# EAGLE board MODIF_PT_ELECROW_VNT (EAGLE 6.5.0)
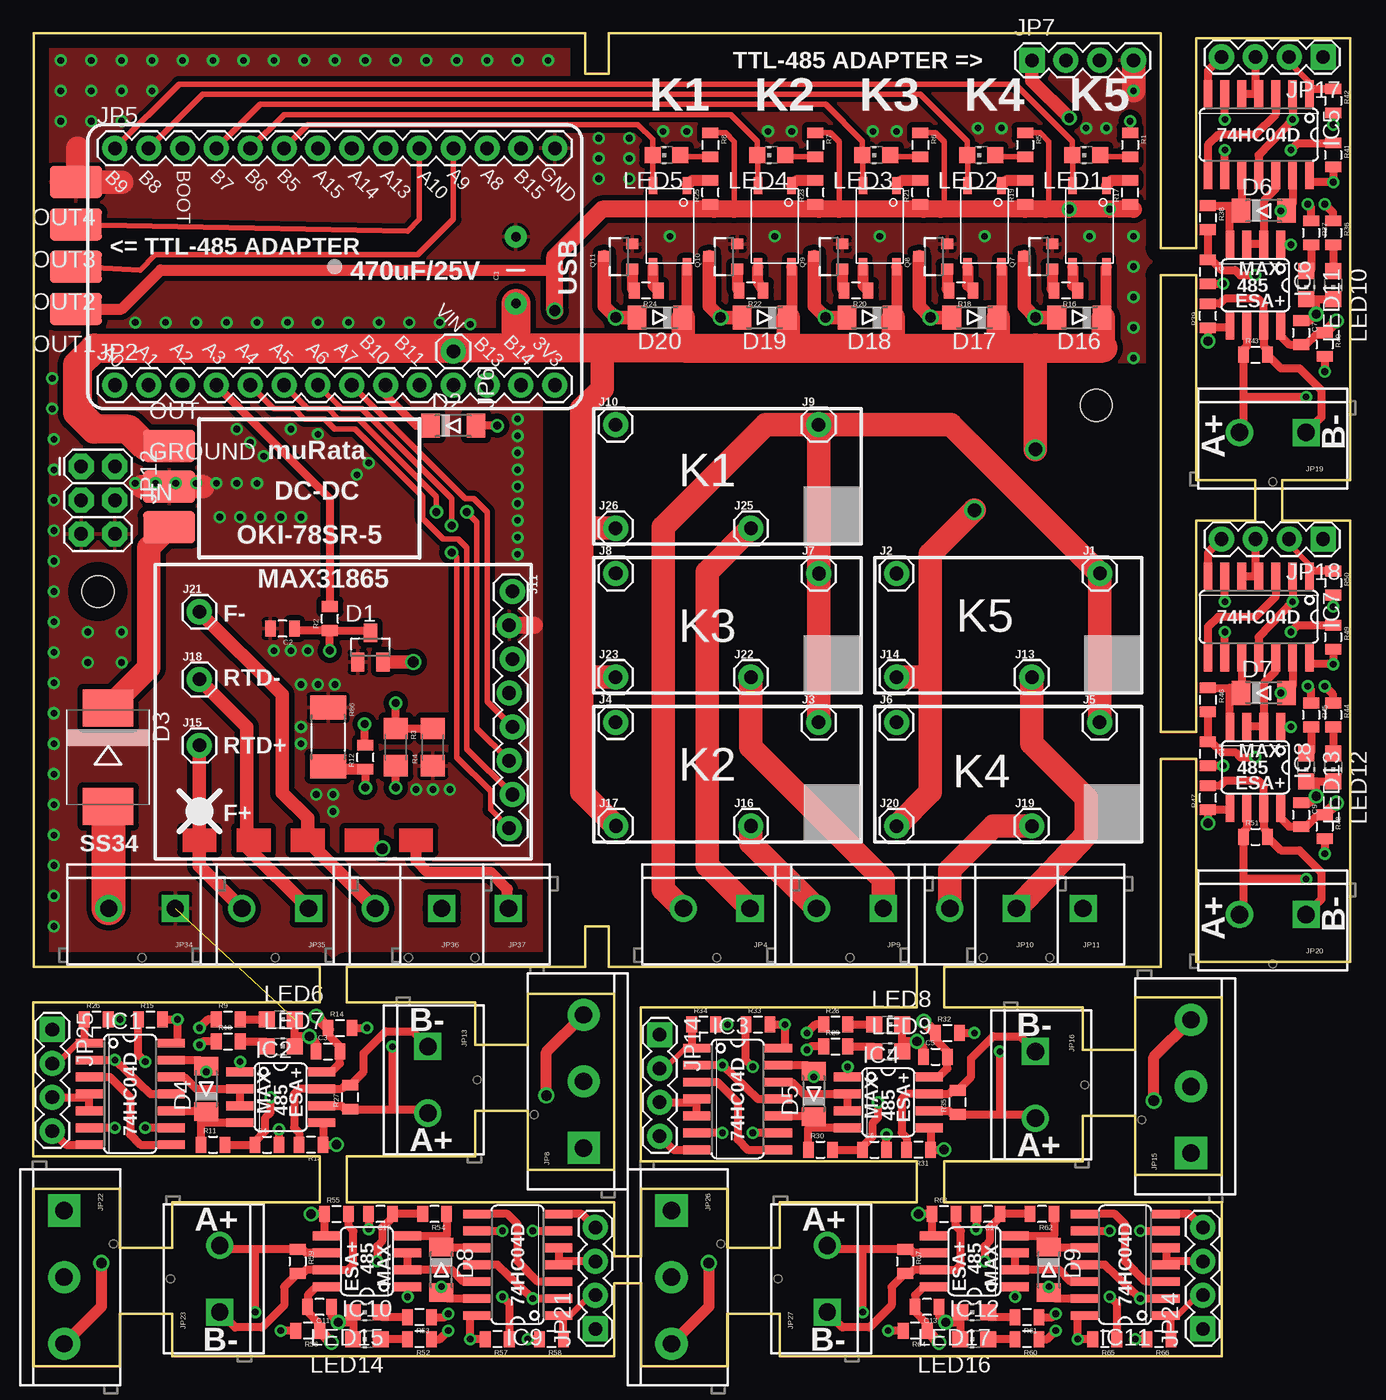
[diagram p0: board, top side]
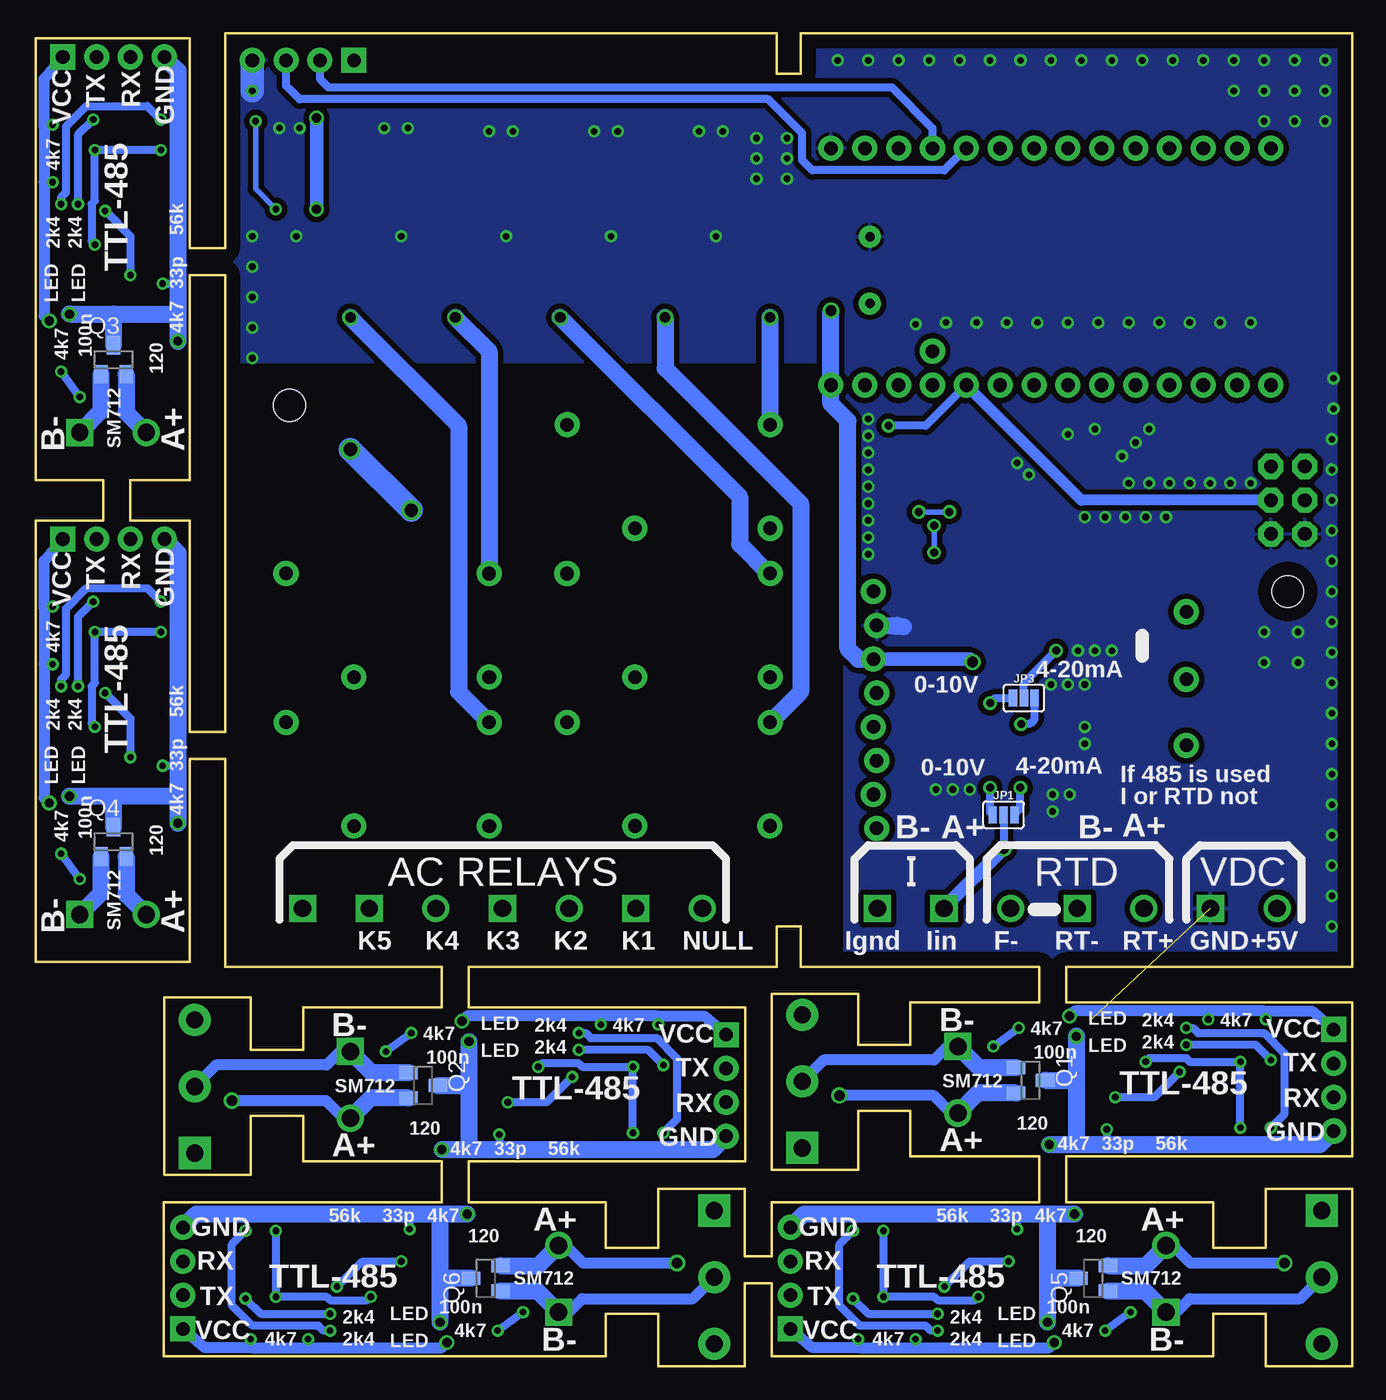
[diagram p1: board, bottom side, seen from below]

Size 98.83 x 100.08 mm. Coordinates in mm from the lower left corner, seen from the top.
Outline: 0.03,100.08 0.03,29.97 21.49,29.97 21.49,27.3 0,27.3 0,15.75 21.49,15.75 21.49,12.32 10.44,12.32 10.44,8.89 6.5,8.89 6.5,13.34 0.03,13.34 0.03,0 6.5,0 6.5,3.94 10.44,3.94 10.44,0.76 43.59,0.76 43.59,6.22 45.62,6.22 45.62,0 52.1,0 52.1,3.94 56.03,3.94 56.03,0.76 89.2,0.76 89.2,12.32 68.35,12.32 68.35,15.37 78.77,15.37 78.77,18.8 82.7,18.8 82.7,14.35 89.18,14.35 89.18,27.69 82.7,27.69 82.7,23.75 78.77,23.75 78.77,26.92 68.35,26.92 68.35,29.97 84.61,29.97 84.61,45.59 87.27,45.59 87.27,30.35 98.83,30.35 98.83,63.5 93.75,63.5 93.75,66.55 98.83,66.55 98.83,99.72 87.27,99.72 87.27,83.95 84.61,83.95 84.61,100.08 43.21,100.08 43.21,97.03 41.43,97.03 41.43,100.08 0.03,100.08
Outline: 43.21,29.97 43.21,33.02 41.43,33.02 41.43,29.97 23.52,29.97 23.52,27.3 33.17,27.3 33.17,24.13 37.11,24.13 37.11,27.94 43.59,27.94 43.59,14.73 37.11,14.73 37.11,19.18 33.17,19.18 33.17,15.75 23.52,15.75 23.52,12.32 43.59,12.32 43.59,8.26 45.62,8.26 45.62,13.34 52.1,13.34 52.1,8.89 56.03,8.89 56.03,12.32 66.32,12.32 66.32,15.37 45.59,15.37 45.59,26.92 66.32,26.92 66.32,29.97 43.21,29.97
Outline: 87.27,81.92 87.27,66.55 91.72,66.55 91.72,63.5 87.27,63.5 87.27,47.62 84.61,47.62 84.61,81.92 87.27,81.92
Copper layers (1*16): Top 0.035mm / dielectric 1.5mm / Bottom 0.035mm
Design rules "default *": minimum track width 10mil, minimum drill 24mil, track to track 8mil, track to pad 8mil, pad to pad 8mil, via to via 8mil, smd to smd 8mil, copper to edge 40mil, drill to drill 8mil, minimum pad ring 10mil, minimum via ring 8mil, stop-mask expansion 4mil, vias tented up to drill 24mil, thermal gap 10mil
Holes 2.4 mm at 4.85,58.17 79.78,72.14

## Footprints (pad centres in the part's own frame; a part is rotated, then mirrored left to right if it is on the bottom)
CAP-PTH-5MM = drill 0.7 pad 1.651: 1 -2.5,0; 2 2.5,0
0805 = smd 0.8 x 1.2: 1 -0.9,0; 2 0.9,0
SOT23 = smd 1 x 1.4: 1 -0.95,-1.1; 2 0.95,-1.1; 3 0,1.1
MINIMELF = smd 1.4 x 1.8: A 1.7,0; C -1.7,0
SMC = smd 2.8 x 3.8: A 3.7,0; C -3.7,0
LUXEON-PAD = smd 3.9 x 2.4: P$1 0,0
SO14 = smd 0.66 x 2.032: 1 -3.81,-3.073; 2 -2.54,-3.073; 3 -1.27,-3.073; 4 0,-3.073; 5 1.27,-3.073; 6 2.54,-3.073; 7 3.81,-3.073; 8 3.81,3.073; 9 2.54,3.073; 10 1.27,3.073; 11 0,3.073; 12 -1.27,3.073; 13 -2.54,3.073; 14 -3.81,3.073
SO08 = smd 0.66 x 2.032: 1 -1.905,-3.073; 2 -0.635,-3.073; 3 0.635,-3.073; 4 1.905,-3.073; 5 1.905,3.073; 6 0.635,3.073; 7 -0.635,3.073; 8 -1.905,3.073
1X01@2 = drill 1.016 pad 1.88: 1 0,0
1X08_LOCK = drill 1.016 pad 1.88: 1 0,0.127; 2 2.54,-0.127; 3 5.08,0.127; 4 7.62,-0.127; 5 10.16,0.127; 6 12.7,-0.127; 7 15.24,0.127; 8 17.78,-0.127
SMT-JUMPER_3_1-NC_PASTE_SILK = smd 0.635 x 1.27: 1 -0.813,0; 2 0,0; 3 0.813,0
1X14 = drill 1.016 pad 1.88: 1 0,0; 2 2.54,0; 3 5.08,0; 4 7.62,0; 5 10.16,0; 6 12.7,0; 7 15.24,0; 8 17.78,0; 9 20.32,0; 10 22.86,0; 11 25.4,0; 12 27.94,0; 13 30.48,0; 14 33.02,0
SCREWTERMINAL-5MM-2 = drill 1.3 pad 2.032 square: 1 0,0 | drill 1.3 pad 2.032: 2 5,0
1X01 = drill 1.016 pad 1.88: 1 0,0
1X04 = drill 1.016 pad 1.88 square: 1 0,0 | drill 1.016 pad 1.88: 2 2.54,0; 3 5.08,0; 4 7.62,0
SCREWTERMINAL-5MM-3 = drill 1.3 pad 2.413 square: 1 0,0 | drill 1.3 pad 2.413: 2 5,0; 3 10,0
2X3 = drill 1.016 pad 1.88 octagon: 1 0,0; 2 0,2.54; 3 2.54,0; 4 2.54,2.54; 5 5.08,0; 6 5.08,2.54
CHIP-LED0805 = smd 1.2 x 1.2: A 0,-1.05; C 0,1.05
SOT23-3 = smd 0.8 x 0.9: 1 -0.95,-1; 2 0.95,-1; 3 0,1.1
1206 = smd 1.6 x 1.8: 1 -1.4,0; 2 1.4,0
R2010 = smd 1.8 x 2.7: 1 -2.2,0; 2 2.2,0
TLP181-I = smd 1.27 x 0.635: P$1 -3.048,1.27; P$2 -3.048,-1.27; P$3 3.048,-1.27; P$4 3.048,1.27

## Placement (x,y rotation side)
C1  [CAP-PTH-5MM]  36.22,82.3 90 top
C2  100n  [0805]  18.69,55.37 180 top
C3  100n  [0805]  22.12,23.62 0 top
C4  33pF  [0805]  17.55,16.64 0 top
C5  100n  [0805]  67.72,23.24 0 top
C6  33pF  [0805]  63.14,16.26 0 top
C7  100n  [0805]  95.15,77.6 270 top
C8  33pF  [0805]  88.16,82.17 270 top
C9  100n  [0805]  95.15,41.4 270 top
C10  33pF  [0805]  88.16,45.97 270 top
C11  100n  [0805]  21.49,4.45 180 top
C12  33pF  [0805]  26.06,11.43 180 top
C13  100n  [0805]  67.08,4.45 180 top
C14  33pF  [0805]  71.65,11.43 180 top
D1  BAT54S  [SOT23]  25.3,53.98 0 top
D2  1N4148  [MINIMELF]  31.52,70.61 0 top
D3  SS34  [SMC]  5.61,45.72 270 top
D4  1N4148  [MINIMELF]  12.98,20.83 90 top
D5  1N4148  [MINIMELF]  58.57,20.45 90 top
D6  1N4148  [MINIMELF]  92.35,86.74 0 top
D7  1N4148  [MINIMELF]  92.35,50.55 0 top
D8  1N4148  [MINIMELF]  30.63,7.24 270 top
D9  1N4148  [MINIMELF]  76.23,7.24 270 top
D16  [MINIMELF]  78.51,78.74 180 top
D17  [MINIMELF]  70.64,78.74 180 top
D18  [MINIMELF]  62.76,78.74 180 top
D19  [MINIMELF]  54.89,78.74 180 top
D20  [MINIMELF]  47.02,78.74 180 top
GROUND  M01SMD  [LUXEON-PAD]  10.19,66.04 0 top
IC1  74HC04D  [SO14]  7.26,20.45 270 top
IC2  MAX3468CSA  [SO08]  18.57,20.19 270 top
IC3  74HC04D  [SO14]  52.86,20.07 270 top
IC4  MAX3468CSA  [SO08]  64.16,19.81 270 top
IC5  74HC04D  [SO14]  91.97,92.46 180 top
IC6  MAX3468CSA  [SO08]  91.72,81.15 180 top
IC7  74HC04D  [SO14]  91.97,56.26 180 top
IC8  MAX3468CSA  [SO08]  91.72,44.96 180 top
IC9  74HC04D  [SO14]  36.35,7.62 90 top
IC10  MAX3468CSA  [SO08]  25.04,7.87 90 top
IC11  74HC04D  [SO14]  81.94,7.62 90 top
IC12  MAX3468CSA  [SO08]  70.64,7.87 90 top
IN  M01SMD  [LUXEON-PAD]  10.19,62.99 0 top
J1  [1X01@2]  80.04,59.52 0 top
J2  [1X01@2]  64.79,59.51 0 top
J3  [1X01@2]  58.95,48.34 0 top
J4  [1X01@2]  43.71,48.35 0 top
J5  [1X01@2]  80.04,48.34 0 top
J6  [1X01@2]  64.79,48.34 0 top
J7  [1X01@2]  58.95,59.51 0 top
J8  [1X01@2]  43.71,59.52 0 top
J9  [1X01@2]  58.95,70.69 0 top
J10  [1X01@2]  43.7,70.69 0 top
J11  [1X08_LOCK]  35.84,58.17 270 top
J13  [1X01@2]  74.95,51.74 0 top
J14  [1X01@2]  64.79,51.74 0 top
J15  [1X01@2]  12.47,46.61 0 top
J16  [1X01@2]  53.86,40.56 0 top
J17  [1X01@2]  43.72,40.56 0 top
J18  [1X01@2]  12.47,51.56 0 top
J19  [1X01@2]  74.95,40.56 0 top
J20  [1X01@2]  64.79,40.56 0 top
J21  [1X01@2]  12.47,56.64 0 top
J22  [1X01@2]  53.86,51.74 0 top
J23  [1X01@2]  43.71,51.74 0 top
J25  [1X01@2]  53.86,62.91 0 top
J26  [1X01@2]  43.71,62.91 0 top
JP1  JUMPER-SMT_3_1-NC_PASTE_SILK  [SMT-JUMPER_3_1-NC_PASTE_SILK]  26.19,41.4 0 bottom
JP2  M14  [1X14]  6.12,73.66 0 top
JP3  JUMPER-SMT_3_1-NC_PASTE_SILK  [SMT-JUMPER_3_1-NC_PASTE_SILK]  24.66,50.16 0 bottom
JP4  [SCREWTERMINAL-5MM-2]  53.79,34.37 180 top
JP5  M14  [1X14]  6.12,91.44 0 top
JP6  M01PTH  [1X01]  31.52,76.2 270 top
JP7  [1X04]  74.96,98.04 0 top
JP8  [SCREWTERMINAL-5MM-3]  41.3,16.38 90 top
JP9  [SCREWTERMINAL-5MM-2]  63.79,34.37 180 top
JP10  [SCREWTERMINAL-5MM-2]  73.79,34.37 180 top
JP11  [SCREWTERMINAL-5MM-2]  78.79,34.37 180 top
JP12  [2X3]  3.58,67.56 270 top
JP13  [SCREWTERMINAL-5MM-2]  29.62,24 270 top
JP14  [1X04]  47.02,24.89 270 top
JP15  [SCREWTERMINAL-5MM-3]  86.89,16 90 top
JP16  [SCREWTERMINAL-5MM-2]  75.21,23.62 270 top
JP17  [1X04]  96.8,98.3 180 top
JP18  [1X04]  96.8,62.1 180 top
JP19  [SCREWTERMINAL-5MM-2]  95.53,70.1 180 top
JP20  [SCREWTERMINAL-5MM-2]  95.53,33.91 180 top
JP21  [1X04]  42.19,2.79 90 top
JP22  [SCREWTERMINAL-5MM-3]  2.31,11.68 270 top
JP23  [SCREWTERMINAL-5MM-2]  14,4.06 90 top
JP24  [1X04]  87.78,2.79 90 top
JP25  [1X04]  1.42,25.27 270 top
JP26  [SCREWTERMINAL-5MM-3]  47.9,11.68 270 top
JP27  [SCREWTERMINAL-5MM-2]  59.59,4.06 90 top
JP34  [SCREWTERMINAL-5MM-2]  10.66,34.37 180 top
JP35  [SCREWTERMINAL-5MM-2]  20.66,34.37 180 top
JP36  [SCREWTERMINAL-5MM-2]  30.66,34.37 180 top
JP37  [SCREWTERMINAL-5MM-2]  35.66,34.37 180 top
LED1  [CHIP-LED0805]  79.02,90.93 90 top
LED2  [CHIP-LED0805]  71.15,90.93 90 top
LED3  [CHIP-LED0805]  63.27,90.93 90 top
LED4  [CHIP-LED0805]  55.4,90.93 90 top
LED5  [CHIP-LED0805]  47.52,90.93 90 top
LED6  [CHIP-LED0805]  18.57,26.04 270 top
LED7  [CHIP-LED0805]  18.57,24 270 top
LED8  [CHIP-LED0805]  64.16,25.65 270 top
LED9  [CHIP-LED0805]  64.16,23.62 270 top
LED10  [CHIP-LED0805]  97.56,81.15 180 top
LED11  [CHIP-LED0805]  95.53,81.15 180 top
LED12  [CHIP-LED0805]  97.56,44.96 180 top
LED13  [CHIP-LED0805]  95.53,44.96 180 top
LED14  [CHIP-LED0805]  25.04,2.03 90 top
LED15  [CHIP-LED0805]  25.04,4.06 90 top
LED16  [CHIP-LED0805]  70.64,2.03 90 top
LED17  [CHIP-LED0805]  70.64,4.06 90 top
OUT  M01SMD  [LUXEON-PAD]  10.19,69.09 0 top
OUT1  M01SMD  [LUXEON-PAD]  3.2,79.38 180 top
OUT2  M01SMD  [LUXEON-PAD]  3.2,82.55 180 top
OUT3  M01SMD  [LUXEON-PAD]  3.2,85.72 180 top
OUT4  M01SMD  [LUXEON-PAD]  3.2,88.9 180 top
Q1  BCX70SMD  [SOT23]  24.16,21.46 270 bottom
Q2  BCX70SMD  [SOT23]  69.75,21.08 270 bottom
Q3  BCX70SMD  [SOT23]  92.99,75.56 0 bottom
Q4  BCX70SMD  [SOT23]  92.99,39.37 0 bottom
Q5  BCX70SMD  [SOT23]  19.46,6.6 90 bottom
Q6  BCX70SMD  [SOT23]  65.05,6.6 90 bottom
Q7  MPSA42  [SOT23-3]  75.46,83.31 90 top
Q8  MPSA42  [SOT23-3]  67.59,83.31 90 top
Q9  MPSA42  [SOT23-3]  59.72,83.31 90 top
Q10  MPSA42  [SOT23-3]  51.84,83.31 90 top
Q11  MPSA42  [SOT23-3]  43.97,83.31 90 top
R1  1K  [0805]  82.32,91.69 270 top
R2  100  [0805]  22.25,56.13 90 top
R3  20K  [1206]  27.2,46.48 270 top
R4  10K  [1206]  30,46.48 90 top
R5  1K  [0805]  74.45,91.69 270 top
R6  1K  [0805]  66.57,91.69 270 top
R7  1K  [0805]  58.7,91.69 270 top
R8  1K  [0805]  50.83,91.69 270 top
R9  2K4  [0805]  14.63,26.04 0 top
R10  2K4  [0805]  14.63,24.38 0 top
R11  56K  [0805]  13.49,16.64 0 top
R12  1k  [0805]  24.92,45.72 90 top
R13  4K7  [0805]  20.85,16.64 180 top
R14  4K7  [0805]  23.01,25.4 0 top
R15  4K7  [0805]  8.79,26.04 0 top
R16  510  [0805]  77.5,80.77 180 top
R17  680  [0805]  82.32,88.14 90 top
R18  510  [0805]  69.62,80.77 180 top
R19  680  [0805]  74.45,88.14 90 top
R20  510  [0805]  61.75,80.77 180 top
R21  680  [0805]  66.57,88.14 90 top
R22  510  [0805]  53.87,80.77 180 top
R23  680  [0805]  58.7,88.14 90 top
R24  510  [0805]  46,80.77 180 top
R25  680  [0805]  50.83,88.14 90 top
R26  4K7  [0805]  4.72,26.04 0 top
R27  120  [0805]  23.77,20.19 90 top
R28  2K4  [0805]  60.22,25.65 0 top
R29  2K4  [0805]  60.22,24 0 top
R30  56K  [0805]  59.08,16.26 0 top
R31  4K7  [0805]  66.45,16.26 180 top
R32  4K7  [0805]  68.61,25.02 0 top
R33  4K7  [0805]  54.38,25.65 0 top
R34  4K7  [0805]  50.32,25.65 0 top
R35  120  [0805]  69.37,19.81 90 top
R36  2K4  [0805]  97.56,85.09 270 top
R37  2K4  [0805]  95.91,85.09 270 top
R38  56K  [0805]  88.16,86.23 270 top
R39  4K7  [0805]  88.16,78.87 90 top
R40  4K7  [0805]  96.93,76.71 270 top
R41  4K7  [0805]  97.56,90.93 270 top
R42  4K7  [0805]  97.56,95 270 top
R43  120  [0805]  91.72,75.95 0 top
R44  2K4  [0805]  97.56,48.9 270 top
R45  2K4  [0805]  95.91,48.9 270 top
R46  56K  [0805]  88.16,50.04 270 top
R47  4K7  [0805]  88.16,42.67 90 top
R48  4K7  [0805]  96.93,40.51 270 top
R49  4K7  [0805]  97.56,54.74 270 top
R50  4K7  [0805]  97.56,58.8 270 top
R51  120  [0805]  91.72,39.75 0 top
R52  2K4  [0805]  28.98,2.03 180 top
R53  2K4  [0805]  28.98,3.68 180 top
R54  56K  [0805]  30.12,11.43 180 top
R55  4K7  [0805]  22.76,11.43 0 top
R56  4K7  [0805]  20.6,2.67 180 top
R57  4K7  [0805]  34.82,2.03 180 top
R58  4K7  [0805]  38.89,2.03 180 top
R59  120  [0805]  19.84,7.87 270 top
R60  2K4  [0805]  74.57,2.03 180 top
R61  2K4  [0805]  74.57,3.68 180 top
R62  56K  [0805]  75.72,11.43 180 top
R63  4K7  [0805]  68.35,11.43 0 top
R64  4K7  [0805]  66.19,2.67 180 top
R65  4K7  [0805]  80.42,2.03 180 top
R66  4K7  [0805]  84.48,2.03 180 top
R67  120  [0805]  65.43,7.87 270 top
R86  120ohm  [R2010]  22.12,47.24 270 top
U$13  IS181D-I  [TLP181-I]  71.4,85.6 270 top
U$14  IS181D-I  [TLP181-I]  79.27,85.6 270 top
U$15  IS181D-I  [TLP181-I]  63.53,85.6 270 top
U$16  IS181D-I  [TLP181-I]  55.65,85.6 270 top
U$17  IS181D-I  [TLP181-I]  47.78,85.6 270 top

## Library data of the parts
C1-C14 R1-R67 R86 = SparkFun-Passives
D1-D9 = diode
D16-D20 = diode_NEDELCU
GROUND IN J1-J11 J13-J23 J25 J26 JP2 JP4-JP7 JP9-JP11 JP13 JP14 JP16-JP21 JP23-JP25 JP27 JP34-JP37 OUT OUT1-OUT4 = SparkFun-Connectors
IC1 IC3 IC5 IC7 IC9 IC11 = 74xx-eu
IC2 IC4 IC6 IC8 IC10 IC12 = maxim; MPN: MAX3468CSA+; OC_FARNELL: unknown; OC_NEWARK: 76K6721
JP1 JP3 = SparkFun-Jumpers
JP8 JP15 JP22 JP26 = SparkFun-Connectors; STOREFRONT_ID: PRT-08433
JP12 = SparkFun-Connectors; PROD_ID: CONN-09701
LED1-LED17 = led
Q1-Q6 = transistor-npn
Q7-Q11 = SparkFun-DiscreteSemi; PROD_ID: TRANS-09116
U$13-U$17 = IS181-I

## Nets
3.3V: D1.2 J11.3 JP2.14 JP7.1 OUT1.P$1 R1.1 R5.1 R6.1 R7.1 R8.1 R17.1 R19.1 R21.1 R23.1 R25.1
3.3V1: C5.2 IC3.14 IC4.8 JP14.1 R32.1 R33.2 R34.2
3.3V2: C7.2 IC5.14 IC6.8 JP17.1 R40.1 R41.2 R42.2
3.3V3: C9.2 IC7.14 IC8.8 JP18.1 R48.1 R49.2 R50.2
3.3V4: C11.2 IC9.14 IC10.8 JP21.1 R56.1 R57.2 R58.2
3.3V5: C13.2 IC11.14 IC12.8 JP24.1 R64.1 R65.2 R66.2
5V: C1.1 D16.C D17.C D18.C D19.C D20.C J14.1 J17.1 J20.1 J23.1 J26.1 JP6.1 OUT.P$1 U$13.P$4 U$14.P$4 U$15.P$4 U$16.P$4 U$17.P$4
A0: JP2.1
A1: JP2.2
A2: JP2.3
A3: JP2.4 R2.2
A4: J11.7 JP2.5
A5: J11.6 JP2.6
A6: J11.8 JP2.7
A7: J11.5 JP2.8
A8: JP5.12
A9: JP5.11 JP7.2 OUT2.P$1
A10: JP5.10 JP7.3 OUT3.P$1
A13: JP5.9
A14: JP5.8
A15: JP5.7
A+: IC2.6 JP8.3 JP13.2 Q1.2 R14.2 R27.1
A+1: IC4.6 JP15.3 JP16.2 Q2.2 R32.2 R35.1
A+2: IC6.6 JP19.2 Q3.2 R40.2 R43.1
A+3: IC8.6 JP20.2 Q4.2 R48.2 R51.1
A+4: IC10.6 JP22.3 JP23.2 Q5.2 R56.2 R59.1
A+5: IC12.6 JP26.3 JP27.2 Q6.2 R64.2 R67.1
B5: JP5.6 LED5.C U$17.P$2
B6: JP5.5 LED4.C U$16.P$2
B7: JP5.4 LED3.C U$15.P$2
B8: JP5.2 LED2.C U$13.P$2
B9: JP5.1 LED1.C U$14.P$2
B12(CS): JP2.11
B13(SCK): JP2.12
B14(MISO): JP2.13
B15(MOSI): JP5.13
B-: IC2.7 JP8.2 JP13.1 Q1.1 R13.2 R27.2
B-1: IC4.7 JP15.2 JP16.1 Q2.1 R31.2 R35.2
B-2: IC6.7 JP19.1 Q3.1 R39.2 R43.2
B-3: IC8.7 JP20.1 Q4.1 R47.2 R51.2
B-4: IC10.7 JP22.2 JP23.1 Q5.1 R55.2 R59.2
B-5: IC12.7 JP26.2 JP27.1 Q6.1 R63.2 R67.2
BOOT: JP5.3
F-: J21.1 JP36.2
GND: C1.2 C2.2 C3.1 C4.2 D1.1 GROUND.P$1 IC1.7 IC2.5 J11.2 JP5.14 JP7.4 JP12.5 JP12.6 JP25.4 JP34.1 LED6.C LED7.C OUT4.P$1 Q1.3 Q7.2 Q8.2 Q9.2 Q10.2 Q11.2 R4.1 R13.1 R86.1
GND2: C5.1 C6.2 IC3.7 IC4.5 JP14.4 LED8.C LED9.C Q2.3 R31.1
GND3: C7.1 C8.2 IC5.7 IC6.5 JP17.4 LED10.C LED11.C Q3.3 R39.1
GND4: C9.1 C10.2 IC7.7 IC8.5 JP18.4 LED12.C LED13.C Q4.3 R47.1
GND5: C11.1 C12.2 IC9.7 IC10.5 JP21.4 LED14.C LED15.C Q5.3 R55.1
GND6: C13.1 C14.2 IC11.7 IC12.5 JP24.4 LED16.C LED17.C Q6.3 R63.1
K1: J25.1 JP4.1
K2: J16.1 JP9.2
K3: J22.1 JP9.1
K4: J19.1 JP10.2
K5: J13.1 JP10.1 JP11.2
K6: JP11.1
N$1: LED1.A R1.2
N$2: LED2.A R5.2
N$3: LED3.A R6.2
N$4: D3.A JP34.2
N$5: JP3.3 R12.2
N$6: JP3.1 R3.1 R4.2
N$7: C2.1 D1.3 JP3.2 R2.1
N$8: JP1.1 R3.2
N$9: LED4.A R7.2
N$10: LED5.A R8.2
N$11: D3.C IN.P$1
N$12: JP37.1
N$13: IC3.9 IC4.1 R33.1
N$14: IC3.3 IC3.8
N$15: C6.1 D5.A IC3.13 R30.2
N$16: LED7.A R10.2
N$17: LED6.A R9.2
N$18: IC3.6 R28.1
N$19: IC1.2 IC1.11 R10.1
N$20: D5.C IC3.10 IC4.4 R30.1
N$21: IC1.9 IC2.1 R15.1
N$22: JP1.2 JP36.1 JP37.2
N$23: IC1.3 IC1.8
N$24: C4.1 D4.A IC1.13 R11.2
N$25: IC3.12 IC4.2 IC4.3
N$26: LED9.A R29.2
N$27: IC1.6 R9.1
N$28: LED8.A R28.2
N$29: D4.C IC1.10 IC2.4 R11.1
N$30: IC1.12 IC2.2 IC2.3
N$31: IC3.2 IC3.11 R29.1
N$32: IC5.9 IC6.1 R41.1
N$33: IC5.3 IC5.8
N$34: C8.1 D6.A IC5.13 R38.2
N$35: IC5.6 R36.1
N$36: D6.C IC5.10 IC6.4 R38.1
N$37: IC5.12 IC6.2 IC6.3
N$38: LED11.A R37.2
N$39: LED10.A R36.2
N$40: IC5.2 IC5.11 R37.1
N$41: IC7.9 IC8.1 R49.1
N$42: IC7.3 IC7.8
N$43: C10.1 D7.A IC7.13 R46.2
N$44: IC7.6 R44.1
N$45: D7.C IC7.10 IC8.4 R46.1
N$46: IC7.12 IC8.2 IC8.3
N$47: LED13.A R45.2
N$48: LED12.A R44.2
N$49: IC7.2 IC7.11 R45.1
N$50: IC9.9 IC10.1 R57.1
N$51: IC9.3 IC9.8
N$52: C12.1 D8.A IC9.13 R54.2
N$53: Q7.1 R16.2
N$54: D16.A J6.1 Q7.3
N$55: Q8.1 R18.2
N$56: D17.A J2.1 Q8.3
N$57: Q9.1 R20.2
N$58: D18.A J8.1 Q9.3
N$59: Q10.1 R22.2
N$60: D19.A J4.1 Q10.3
N$61: Q11.1 R24.2
N$62: D20.A J10.1 Q11.3
N$63: IC9.6 R52.1
N$64: D8.C IC9.10 IC10.4 R54.1
N$65: IC9.12 IC10.2 IC10.3
N$66: LED15.A R53.2
N$67: LED14.A R52.2
N$68: IC9.2 IC9.11 R53.1
N$69: IC11.9 IC12.1 R65.1
N$70: IC11.3 IC11.8
N$71: C14.1 D9.A IC11.13 R62.2
N$72: IC11.6 R60.1
N$73: D9.C IC11.10 IC12.4 R62.1
N$74: IC11.12 IC12.2 IC12.3
N$75: LED17.A R61.2
N$76: LED16.A R60.2
N$77: R16.1 U$14.P$3
N$78: R17.2 U$14.P$1
N$79: IC11.2 IC11.11 R61.1
N$80: R18.1 U$13.P$3
N$81: R20.1 U$15.P$3
N$82: R22.1 U$16.P$3
N$83: R24.1 U$17.P$3
N$85: R19.2 U$13.P$1
N$87: R21.2 U$15.P$1
N$89: R23.2 U$16.P$1
N$91: R25.2 U$17.P$1
N$104: JP1.3 R12.1 R86.2
NULL: J1.1 J3.1 J5.1 J7.1 J9.1 JP4.2
RTD+: J15.1 JP35.2
RTD-: J18.1 JP35.1
RX: IC1.1 JP25.2 R26.1
RX1: IC3.1 JP14.2 R34.1
RX2: IC5.1 JP17.2 R42.1
RX3: IC7.1 JP18.2 R50.1
RX4: IC9.1 JP21.2 R58.1
RX5: IC11.1 JP24.2 R66.1
RXD1: D2.C JP2.9
S$1: C3.2 IC1.14 IC2.8 JP25.1 R14.1 R15.2 R26.2
TX: IC1.4 IC1.5 JP25.3
TX1: IC3.4 IC3.5 JP14.3
TX2: IC5.4 IC5.5 JP17.3
TX3: IC7.4 IC7.5 JP18.3
TX4: IC9.4 IC9.5 JP21.3
TX5: IC11.4 IC11.5 JP24.3
TXD1: D2.A JP2.10 JP12.4

## Tracks (layer width: path | path; a pad name or v marks a point on that pad's centre or on a via)
3.3V  (via drill 0.5, 0.7, 0.8)
  Top 0.406: R8.1 51.96,92.59 52.6,91.95 52.6,86.87 | R5.1 75.58,92.59 76.23,91.95 76.23,87.12 75.97,86.87 | R7.1 59.83,92.59 60.48,91.95 60.48,86.87 | R6.1 67.71,92.59 68.35,91.95 68.35,87.12 68.1,86.87 | R1.1 v82.32,93.47
  Top 0.813: R19.1 74.45,86.87 | R17.1 82.58,86.87 | R21.1 66.83,86.87 | R23.1 58.95,86.87 | R25.1 51.08,86.87 | OUT1.P$1 6.63,79.38 9.55,82.3 39.14,82.3
  Top 1.016: D1.2 v28.52,52.88 | JP7.1 74.96,96.52 v77.75,93.73
  Top 1.27: 82.58,86.87 v80.8,86.87 v77.75,86.87 75.97,86.87 74.45,86.87 68.1,86.87 66.83,86.87 60.48,86.87 58.95,86.87 52.6,86.87 51.08,86.87 42.7,86.87 39.14,83.31 39.14,82.3 v39.14,79.25
  Bottom 0.406: v82.32,93.47 82.32,88.39 v80.8,86.87
  Bottom 1.016: v28.52,52.88 28.73,53.09 J11.3 | v77.75,93.73 v77.75,86.87
  Bottom 1.27: JP2.14 v39.14,79.25 | JP2.14 38.89,73.53 | J11.3 37.11,53.09 37.87,53.85 37.87,70.99 39.14,72.26 JP2.14
3.3V1  (via drill 0.5, 0.7)
  Top 0.61: R33.2 v56.41,25.65 56.41,23.88 IC3.14 | R34.2 v52.1,25.65 | IC4.8 67.97,21.72 68.61,22.35 C5.2 68.62,23.61 67.84,24.38 67.84,24.88 R32.1
  Top 0.813: R32.1 v66.83,25.91
  Bottom 0.61: v56.41,25.65 56.41,26.29 | v52.1,25.65 52.1,26.29 52.22,26.29
  Bottom 0.813: v66.83,25.91 66.45,26.29 56.41,26.29 52.22,26.29 48.67,26.29 JP14.1
3.3V2  (via drill 0.5, 0.7)
  Top 0.61: R41.2 v97.56,88.9 95.78,88.9 IC5.14 | R42.2 v97.56,93.22 | IC6.8 93.62,77.34 94.26,76.71 C7.2 95.52,76.7 96.29,77.47 96.79,77.47 R40.1 96.94,77.61
  Top 0.813: 96.94,77.61 v97.82,78.49
  Bottom 0.61: v97.56,88.9 98.2,88.9 | v97.56,93.22 98.2,93.22 98.2,93.09
  Bottom 0.813: v97.82,78.49 98.2,78.87 98.2,88.9 98.2,93.09 98.2,96.65 JP17.1
3.3V3  (via drill 0.5, 0.7)
  Top 0.61: R49.2 v97.56,52.7 95.78,52.7 IC7.14 | R50.2 v97.56,57.02 | IC8.8 93.62,41.15 94.26,40.51 95.14,40.51 C9.2 95.52,40.5 96.29,41.27 96.79,41.27 R48.1 96.94,41.41
  Top 0.813: 96.94,41.41 v97.82,42.29
  Bottom 0.61: v97.56,52.7 98.2,52.7 | v97.56,57.02 98.2,57.02 98.2,56.9
  Bottom 0.813: v97.82,42.29 98.2,42.67 98.2,52.7 98.2,56.9 98.2,60.45 JP18.1
3.3V4  (via drill 0.5, 0.7)
  Top 0.61: R57.2 v32.79,2.03 32.79,3.81 IC9.14 | R58.2 v37.11,2.03 | IC10.8 21.23,5.97 20.6,5.33 20.6,4.46 C11.2 20.59,4.08 21.36,3.3 21.36,2.81 R56.1 21.5,2.66
  Top 0.813: 21.5,2.66 v22.38,1.78
  Bottom 0.61: v32.79,2.03 32.79,1.4 | v37.11,2.03 37.11,1.4 36.98,1.4
  Bottom 0.813: v22.38,1.78 22.76,1.4 32.79,1.4 36.98,1.4 40.54,1.4 JP21.1
3.3V5  (via drill 0.5, 0.7)
  Top 0.61: R65.2 v78.38,2.03 78.38,3.81 IC11.14 | R66.2 v82.7,2.03 | IC12.8 66.83,5.97 66.19,5.33 C13.2 66.18,4.08 66.95,3.3 66.95,2.81 R64.1 67.09,2.66
  Top 0.813: 67.09,2.66 v67.97,1.78
  Bottom 0.61: v78.38,2.03 78.38,1.4 | v82.7,2.03 82.7,1.4 82.58,1.4
  Bottom 0.813: v67.97,1.78 68.35,1.4 78.38,1.4 82.58,1.4 86.13,1.4 JP24.1
5V  (via drill 1)
  Top 0.813: U$13.P$4 72.67,78.74 72.42,78.74 | 80.29,78.74 80.54,78.74 U$14.P$4 | U$16.P$4 56.92,78.74 56.67,78.74 | U$17.P$4 49.05,78.74 48.79,78.74 | U$15.P$4 64.8,78.74 64.54,78.74
  Top 1.27: D20.C 48.79,78.74 | D19.C 56.67,78.74 | D18.C 64.54,78.74 | 72.42,78.74 D17.C | D16.C 80.29,78.74
  Top 1.778: 80.29,76.45 80.29,78.74 | 72.42,78.74 72.42,76.45 | 64.54,78.74 64.54,76.45 | 48.79,78.74 48.79,76.45 | 56.67,78.74 56.67,76.45 | JP6.1 31.27,76.45 | 8.41,69.09 OUT.P$1 | J17.1 41.17,43.11 41.17,51.82 | 41.17,51.82 41.17,62.74 | 41.17,62.74 41.17,71.88 42.7,73.41 42.7,76.45 | J26.1 41.35,62.91 41.17,62.74 | J23.1 41.25,51.74 41.17,51.82 | J20.1 67.34,43.11 67.34,51.74 | 67.34,51.74 67.34,60.96 v70.64,64.26 | J14.1 67.34,51.74 | v75.21,68.83 75.21,76.45
  Top 2.184: 80.29,76.45 75.21,76.45 72.42,76.45 64.54,76.45 56.67,76.45 48.79,76.45 42.7,76.45 36.6,76.45 | 36.6,76.45 31.27,76.45 4.6,76.45 3.33,75.18 3.33,71.63 4.6,70.36 7.14,70.36 8.41,69.09 | C1.1 36.22,76.83 36.6,76.45
  Bottom 1.778: v70.64,64.26 v75.21,68.83
A3
  Top 0.61: JP2.4 22.25,65.15 R2.2
A4
  Top 0.406: J11.7 32.54,46.35 32.54,61.47 31.9,62.1 30.76,62.1 29.24,63.63 29.24,65.28 24.16,70.36 22.63,70.36 21.87,71.12 20.35,71.12 19.58,71.88 18.06,71.88 JP2.5
A5  (via drill 0.6)
  Top 0.406: J11.6 33.3,47.88 33.3,63.37 v32.54,64.14 | v30.25,64.14 30.25,65.28 24.41,71.12 22.89,71.12 22.12,71.88 20.6,71.88 JP2.6
  Bottom 0.406: v30.25,64.14 v32.54,64.14
A6  (via drill 0.6)
  Top 0.406: JP2.7 23.14,71.88 24.66,71.88 31.39,65.15 v31.39,63.12 | v31.39,61.09 31.78,60.71 31.78,45.72 34.32,43.18 34.32,41.78 J11.8
  Bottom 0.406: v31.39,63.12 v31.39,61.09
A7
  Top 0.406: J11.5 34.06,49.91 34.06,64.14 33.05,65.15 32.41,65.15 JP2.8
A9
  Top 0.406: OUT2.P$1 8.03,82.3 9.17,83.44 28.85,83.44 31.52,86.11 JP5.11
  Bottom 0.61: JP7.2 77.5,96.65 76.86,96.01 34.57,96.01 31.52,92.96 JP5.11
A10
  Top 0.406: OUT3.P$1 28.09,85.22 28.98,86.11 JP5.10
  Bottom 0.61: JP5.10 30.63,89.79 40.54,89.79 41.3,90.55 41.3,92.58 43.84,95.12 79.02,95.12 80.04,96.14 JP7.3
A+  (via drill 0.5, 0.8)
  Top 0.61: IC2.6 23.14,19.56 23.4,19.29 R27.1 26.95,19.29 | 26.95,19.29 29.33,19.29 JP13.2 | R14.2 v25.04,25.4 | v26.95,24 26.95,19.29
  Top 0.813: v38.51,20.32 38.51,23.59 JP8.3
  Bottom 0.61: v25.04,25.4 v26.95,24
  Bottom 0.813: v38.51,20.32 31.44,20.32 30.12,19 JP13.2
  Bottom 1.27: Q1.2 28.11,20.51 JP13.2
A+1  (via drill 0.5, 0.8)
  Top 0.61: IC4.6 68.73,19.18 69,18.91 R35.1 72.54,18.91 | 72.54,18.91 74.92,18.91 JP16.2 | R32.2 v70.64,25.02 | v72.54,23.62 72.54,18.91
  Top 0.813: v84.1,19.94 84.1,23.21 JP15.3
  Bottom 0.61: v70.64,25.02 v72.54,23.62
  Bottom 0.813: v84.1,19.94 77.03,19.94 75.72,18.62 JP16.2
  Bottom 1.27: Q2.2 73.7,20.13 JP16.2
A+2  (via drill 0.5)
  Top 0.61: IC6.6 91.08,76.58 90.82,76.32 R43.1 90.82,72.77 | 90.82,72.77 90.82,70.39 JP19.2 | R40.2 v96.93,74.68 | v95.53,72.77 90.82,72.77
  Bottom 0.61: v96.93,74.68 v95.53,72.77
  Bottom 1.27: Q3.2 92.04,71.61 JP19.2
A+3  (via drill 0.5)
  Top 0.61: IC8.6 91.08,40.39 90.82,40.12 R51.1 90.82,36.58 | 90.82,36.58 90.82,34.2 JP20.2 | R48.2 v96.93,38.48 | v95.53,36.58 90.82,36.58
  Bottom 0.61: v96.93,38.48 v95.53,36.58
  Bottom 1.27: Q4.2 92.04,35.42 JP20.2
A+4  (via drill 0.5, 0.8)
  Top 0.61: IC10.6 20.47,8.51 20.21,8.77 R59.1 16.66,8.77 | 16.66,8.77 14.29,8.77 JP23.2 | R56.2 v18.57,2.67 | v16.66,4.06 16.66,8.77
  Top 0.813: v5.11,7.75 5.11,4.48 JP22.3
  Bottom 0.61: v18.57,2.67 v16.66,4.06
  Bottom 0.813: v5.11,7.75 12.17,7.75 13.49,9.06 JP23.2
  Bottom 1.27: Q5.2 15.51,7.55 JP23.2
A+5  (via drill 0.5, 0.8)
  Top 0.61: IC12.6 66.07,8.51 65.8,8.77 R67.1 62.26,8.77 | 62.26,8.77 59.88,8.77 JP27.2 | R64.2 v64.16,2.67 | v62.26,4.06 62.26,8.77
  Top 0.813: v50.7,7.75 50.7,4.48 JP26.3
  Bottom 0.61: v64.16,2.67 v62.26,4.06
  Bottom 0.813: v50.7,7.75 57.76,7.75 59.08,9.06 JP27.2
  Bottom 1.27: Q6.2 61.1,7.55 JP27.2
B5
  Top 0.406: JP5.6 20.6,93.22 45.36,93.22 46.47,92.11 LED5.C 46.51,90.93 U$17.P$2
B6
  Top 0.406: JP5.5 18.82,93.98 52.35,93.98 54.35,91.98 LED4.C 54.38,90.93 U$16.P$2
B7
  Top 0.406: JP5.4 17.04,94.74 59.46,94.74 62.22,91.98 LED3.C 62.26,90.93 U$15.P$2
B8
  Top 0.406: JP5.2 12.73,95.5 66.57,95.5 70.1,91.98 LED2.C 70.13,90.68 U$13.P$2
B9
  Top 0.406: JP5.1 10.95,96.27 73.69,96.27 77.97,91.98 LED1.C 78,90.68 U$14.P$2
B-
  Top 0.61: R13.2 19.95,17.54 19.58,17.91 19.58,20.45 19.96,20.83 IC2.7 23.14,20.83 23.4,21.09 R27.2 24.79,22.11 24.79,23.5 26.44,25.15 28.47,25.15 JP13.1
  Bottom 0.813: JP13.1 30.38,24 31.39,22.99 39.7,22.99 JP8.2
  Bottom 1.27: Q1.1 28.03,22.41 JP13.1
B-1
  Top 0.61: R31.2 65.55,17.16 65.18,17.53 65.18,20.07 65.56,20.45 IC4.7 68.73,20.45 69,20.71 R35.2 70.38,21.73 70.38,23.11 72.03,24.77 74.07,24.77 JP16.1
  Bottom 0.813: JP16.1 75.97,23.62 76.99,22.61 85.29,22.61 JP15.2
  Bottom 1.27: Q2.1 73.62,22.03 JP16.1
B-2
  Top 0.61: R39.2 89.06,79.77 89.43,80.14 91.97,80.14 92.35,79.76 IC6.7 92.35,76.58 92.62,76.32 R43.2 93.64,74.93 95.02,74.93 96.67,73.28 96.67,71.25 JP19.1
  Bottom 1.27: Q3.1 93.94,71.69 JP19.1
B-3
  Top 0.61: R47.2 89.06,43.57 89.43,43.94 91.97,43.94 92.35,43.56 IC8.7 92.35,40.39 92.62,40.12 R51.2 93.64,38.73 95.02,38.73 96.67,37.08 96.67,35.05 JP20.1
  Bottom 1.27: Q4.1 93.94,35.5 JP20.1
B-4
  Top 0.61: R55.2 23.66,10.53 24.03,10.16 24.03,7.62 23.65,7.24 IC10.7 20.47,7.24 20.21,6.97 R59.2 18.82,5.96 18.82,4.57 17.17,2.92 15.14,2.92 JP23.1
  Bottom 0.813: JP23.1 13.23,4.06 12.22,5.08 3.92,5.08 JP22.2
  Bottom 1.27: Q5.1 15.59,5.65 JP23.1
B-5
  Top 0.61: R63.2 69.25,10.53 69.62,10.16 69.62,7.62 69.24,7.24 IC12.7 66.07,7.24 65.8,6.97 R67.2 64.41,5.96 64.41,4.57 62.76,2.92 60.73,2.92 JP27.1
  Bottom 0.813: JP27.1 58.83,4.06 57.81,5.08 49.51,5.08 JP26.2
  Bottom 1.27: Q6.1 61.18,5.65 JP27.1
F-
  Top 1.016: J21.1 18.69,50.42 18.69,43.05 20.6,41.15 20.6,39.43 JP36.2
GND  (via drill 0.5, 0.7)  (1 unrouted)
  Top 0.61: C3.1 21.22,24.27 v20.73,24.77 19.62,24.77 | LED7.C 19.62,24.77 | 19.62,24.77 LED6.C | JP25.4 2.44,16.64 IC1.7 | IC2.5 21.75,18.29 R13.1 v22.76,16.64 | C4.2 18.44,16.64 v18.44,17.78
  Top 1.27: 37.62,55.63 35.84,55.63
  Top 1.778: 8.15,66.04 12.73,66.04 | JP7.4 v82.58,95.76 | 3.33,91.44 3.33,89.15 | 4.34,88.9 6.63,88.9
  Bottom 0.61: v18.44,17.78 18.44,16.64 19.2,16.64
  Bottom 1.27: 33.68,55.5 J11.2 34.19,55.63 | JP25.4 2.44,16.64 19.2,16.64 20.73,16.64 | 20.73,16.64 v22.76,16.64 | v20.73,24.77 20.73,21.46 | 20.73,21.46 20.73,16.64 | Q1.3 20.73,21.46
  Bottom 1.778: JP7.4 v82.58,95.76
  other vias: 1.55,67.31 1.55,65.02 1.55,62.74 80.54,92.96 55.14,92.71 63.02,92.71 56.92,92.71 49.05,92.71 72.67,92.96 44.73,89.15 44.73,90.68 44.73,92.2 79.02,92.96 47.27,92.71 64.8,92.71 42.44,92.2 42.44,90.68 42.44,89.15 47.78,84.84 55.65,84.84 63.53,84.84 71.4,84.84 79.27,84.84 19.33,70.36 21.36,69.98 24.28,66.93 25.17,67.82 16.28,69.34 17.3,68.33 15.27,70.36 7.65,78.36 9.93,78.36 12.22,78.36 14.5,78.36 16.79,78.36 19.08,78.36 21.36,78.36 23.65,78.36 25.93,78.36 17.04,63.75 18.57,63.75 20.09,63.75 6.63,55.12 4.09,52.83 6.63,52.83 1.55,55.88 4.09,55.12 1.55,53.59 15.52,63.75 2.06,98.04 4.34,98.04 6.63,98.04 8.92,98.04 11.2,98.04 13.49,98.04 15.77,98.04 18.06,98.04 2.06,95.76 2.06,93.47 4.34,95.76 4.34,93.47 6.63,95.76 6.63,93.47 8.92,95.76 70.89,92.96 20.35,98.04 22.63,98.04 24.92,98.04 27.2,98.04 29.49,98.04 31.78,98.04 34.06,98.04 36.35,98.04 38.63,98.04 82.58,84.84 82.58,82.55 82.58,80.26 82.58,77.98 82.58,75.69 1.55,69.6 1.42,71.88 1.42,74.17 28.22,78.36 30.51,78.36 32.79,78.23 1.55,60.45 1.55,58.17 1.55,51.31 1.55,49.02 1.55,46.74 1.55,44.45 1.55,42.16 1.55,39.88 1.55,37.59 1.55,35.31 1.55,33.02 36.35,68.58 36.35,69.85 36.35,67.31 36.35,71.12 7.65,66.29 9.17,66.29 10.69,66.29 12.22,66.29 13.74,66.29 14,63.75 15.27,66.29 16.79,66.29 36.35,66.04 36.35,64.77 36.35,63.5 36.35,62.23 36.35,60.96 20.09,48.01 20.09,46.74 21.23,42.93 22.5,42.93 22.5,41.66 18.06,53.72 19.33,53.72 20.6,53.72 28.73,43.31 30,43.31 31.27,43.31 22.63,51.18 21.36,51.18 20.09,51.18
  pour Bottom (isolate 0.406): 0.03,29.97 38.13,29.97 38.13,75.44 84.61,75.44 84.61,100.08 0.03,100.08
  pour Top (isolate 0.406): 0.03,29.97 38.13,29.97 38.13,75.44 84.61,75.44 84.61,100.08 0.03,100.08
GND2  (via drill 0.5, 0.7)
  Top 0.61: C5.1 66.82,23.89 v66.32,24.38 65.21,24.38 | LED9.C 65.21,24.38 | 65.21,24.38 LED8.C | JP14.4 48.03,16.26 IC3.7 | IC4.5 67.35,17.91 R31.1 v68.35,16.26 | C6.2 64.03,16.26 v64.03,17.4
  Bottom 0.61: v64.03,17.4 64.03,16.26 64.8,16.26
  Bottom 1.27: JP14.4 48.03,16.26 64.8,16.26 66.32,16.26 | 66.32,16.26 v68.35,16.26 | v66.32,24.38 66.32,21.08 | 66.32,21.08 66.32,16.26 | Q2.3 66.32,21.08
GND3  (via drill 0.5, 0.7)
  Top 0.61: C7.1 95.79,78.5 v96.29,78.99 96.29,80.1 | LED11.C 96.29,80.1 | 96.29,80.1 LED10.C | JP17.4 88.16,97.28 IC5.7 | IC6.5 89.81,77.97 R39.1 v88.16,76.96 | C8.2 v89.31,81.28
  Bottom 0.61: v89.31,81.28 C8.2 88.16,80.52
  Bottom 1.27: JP17.4 88.16,97.28 88.16,80.52 88.16,78.99 | 88.16,78.99 v88.16,76.96 | v96.29,78.99 92.99,78.99 | 92.99,78.99 88.16,78.99 | Q3.3 92.99,78.99
GND4  (via drill 0.5, 0.7)
  Top 0.61: C9.1 95.79,42.3 v96.29,42.8 96.29,43.91 | LED13.C 96.29,43.91 | 96.29,43.91 LED12.C | JP18.4 88.16,61.09 IC7.7 | IC8.5 89.81,41.77 R47.1 v88.16,40.77 | C10.2 88.16,45.09 v89.31,45.09
  Bottom 0.61: v89.31,45.09 88.16,45.09 88.16,44.32
  Bottom 1.27: JP18.4 88.16,61.09 88.16,44.32 88.16,42.8 | 88.16,42.8 v88.16,40.77 | v96.29,42.8 92.99,42.8 | 92.99,42.8 88.16,42.8 | Q4.3 92.99,42.8
GND5  (via drill 0.5, 0.7)
  Top 0.61: C11.1 22.39,3.8 v22.89,3.3 23.99,3.3 | LED15.C 23.99,3.3 | 23.99,3.3 LED14.C | JP21.4 41.17,11.43 IC9.7 | IC10.5 21.86,9.78 R55.1 v20.85,11.43 | C12.2 v25.17,10.29
  Bottom 0.61: v25.17,10.29 C12.2 24.41,11.43
  Bottom 1.27: JP21.4 41.17,11.43 24.41,11.43 22.89,11.43 | 22.89,11.43 v20.85,11.43 | v22.89,3.3 22.89,6.6 | 22.89,6.6 22.89,11.43 | Q5.3 22.89,6.6
GND6  (via drill 0.5, 0.7)
  Top 0.61: C13.1 67.98,3.8 v68.48,3.3 69.59,3.3 | LED17.C 69.59,3.3 | 69.59,3.3 LED16.C | JP24.4 86.77,11.43 IC11.7 | IC12.5 67.45,9.78 R63.1 v66.45,11.43 | C14.2 v70.76,10.29
  Bottom 0.61: v70.76,10.29 C14.2 70,11.43
  Bottom 1.27: JP24.4 86.77,11.43 70,11.43 68.48,11.43 | 68.48,11.43 v66.45,11.43 | v68.48,3.3 68.48,6.6 | 68.48,6.6 68.48,11.43 | Q6.3 68.48,6.6
K1
  Top 1.778: J25.1 50.57,59.62 50.57,37.59 JP4.1
K2
  Top 1.778: J16.1 53.86,39.3 JP9.2
K3
  Top 1.778: J22.1 53.86,46.49 63.79,36.56 JP9.1
K4
  Top 1.778: J19.1 72.08,40.56 68.79,37.27 JP10.2
K5
  Top 1.778: J13.1 74.95,46.74 79.02,42.67 79.02,39.88 JP11.2
N$1
  Top 0.406: R1.2 80.21,90.79 LED1.A
N$2
  Top 0.406: R5.2 72.2,90.79 LED2.A
N$3
  Top 0.406: R6.2 64.46,90.79 LED3.A
N$4
  Top 2.54: JP34.2 5.66,41.98 D3.A
N$5  (via drill 0.6)
  Top 0.61: R12.2 24.87,46.67 v24.87,48.21
  Bottom 0.61: v24.87,48.21 24.82,48.26 24.16,48.26 23.85,48.56 JP3.3
N$6  (via drill 0.6)
  Top 0.61: R4.2 R3.1 v27.2,49.78
  Bottom 0.61: v27.2,49.78 26.82,50.16 JP3.1
N$7  (via drill 0.6)
  Top 0.61: R2.1 19.59,55.23 C2.1 | v22.25,53.72 R2.1 | R2.1 25.27,55.23 D1.3
  Bottom 0.61: JP3.2 24.66,51.31 v22.25,53.72
N$8  (via drill 0.6)
  Top 0.61: v27.2,43.43 R3.2
  Bottom 0.61: JP1.1 27.2,41.6 v27.2,43.43
N$9
  Top 0.406: R7.2 56.59,90.79 LED4.A
N$10
  Top 0.406: R8.2 48.71,90.79 LED5.A
N$11
  Top 1.778: IN.P$1 8.66,61.47 8.66,52.47 D3.C
N$12
  Top 0.813: JP37.1 35.59,34.42 35.59,35.81 34.32,37.08 29.62,37.08 28.73,37.97 28.73,39.52
N$13  (via drill 0.5)
  Top 0.406: IC4.1 61.11,21.74 v61.11,22.48
  Top 0.61: IC3.9 v54,17.53 | v54,22.48 53.48,22.98 R33.1
  Bottom 0.61: v54,17.53 v54,22.48 57.81,22.48 58.06,22.73 60.86,22.73 v61.11,22.48
N$14
  Top 0.61: IC3.3 51.33,21.34 52.86,19.81 52.86,17.02 53.62,16.26 IC3.8
N$15  (via drill 0.5)
  Top 0.406: D5.A 58.49,21.84 v58.57,21.72 | C6.1 62.24,16.5
  Top 0.61: IC3.13 58.06,22.61 D5.A | R30.2 C6.1 | 62.24,16.5 63.02,17.27 63.02,18.29 63.4,18.67 v63.4,19.81
  Bottom 0.61: v58.57,21.72 60.48,19.81 v63.4,19.81
N$16
  Top 0.406: 17.44,24.38 LED7.A
  Top 0.61: R10.2 17.44,24.38
N$17
  Top 0.61: R9.2 LED6.A
N$18  (via drill 0.5)
  Top 0.61: v51.71,17.53 IC3.6 | R28.1 58.7,25.65 v58.06,25.02
  Bottom 0.61: v58.06,25.02 57.56,25.02 57.18,24.64 52.22,24.64 50.7,23.11 50.7,18.54 v51.71,17.53
N$19  (via drill 0.5)
  Top 0.61: IC1.2 v6.12,22.99 8.79,20.45 IC1.11 | R10.1 12.73,24.38 v12.47,24.13
  Bottom 0.61: v6.12,22.99 7.26,24.13 v12.47,24.13
N$20
  Top 0.406: 57.73,18.8 D5.C 58.18,18.87 58.18,17.91
  Top 0.61: IC3.10 57.73,18.8 | R30.1 58.18,17.91 IC4.4
N$21  (via drill 0.5)
  Top 0.406: IC2.1 15.52,22.12 v15.52,22.86
  Top 0.61: IC1.9 v8.41,17.91 | v8.41,22.86 7.89,23.36 R15.1
  Bottom 0.61: v8.41,17.91 v8.41,22.86 12.22,22.86 12.47,23.11 15.27,23.11 v15.52,22.86
N$22  (via drill 0.8)
  Bottom 0.61: JP1.2 v26.19,38.86
  Bottom 1.016: JP37.2 30.66,34.39 v26.19,38.86
N$23
  Top 0.61: IC1.3 5.74,21.72 7.26,20.19 7.26,17.4 8.03,16.64 IC1.8
N$24  (via drill 0.5)
  Top 0.406: D4.A 12.9,22.23 v12.98,22.1 | C4.1 16.65,16.88
  Top 0.61: IC1.13 12.47,22.99 D4.A | R11.2 C4.1 | 16.65,16.88 17.42,17.65 17.42,18.67 17.81,19.05 v17.81,20.19
  Bottom 0.61: v12.98,22.1 14.88,20.19 v17.81,20.19
N$25
  Top 0.406: IC3.12 56.92,21.34
  Top 0.61: IC4.3 IC4.2 57.81,20.45 56.92,21.34
N$26
  Top 0.406: 63.03,24 LED9.A
  Top 0.61: R29.2 63.03,24
N$27  (via drill 0.5)
  Top 0.61: v6.12,17.91 IC1.6 | R9.1 13.11,26.04 v12.47,25.4
  Bottom 0.61: v12.47,25.4 11.96,25.4 11.58,25.02 6.63,25.02 5.11,23.5 5.11,18.92 v6.12,17.91
N$28
  Top 0.61: R28.2 LED8.A
N$29
  Top 0.406: 12.14,19.18 D4.C 12.59,19.25 12.59,18.29
  Top 0.61: IC1.10 12.14,19.18 | R11.1 12.59,18.29 IC2.4
N$30
  Top 0.406: IC1.12 11.33,21.72
  Top 0.61: IC2.3 IC2.2 12.22,20.83 11.33,21.72
N$31  (via drill 0.5)
  Top 0.61: IC3.2 v51.71,22.61 54.38,20.07 IC3.11 | R29.1 58.32,24 v58.06,23.75
  Bottom 0.61: v51.71,22.61 52.86,23.75 v58.06,23.75
N$32  (via drill 0.5)
  Top 0.406: IC6.1 93.65,84.2 v94.39,84.2
  Top 0.61: IC5.9 v89.43,91.31 | v94.39,91.31 94.88,91.83 R41.1
  Bottom 0.61: v89.43,91.31 v94.39,91.31 94.39,87.5 94.64,87.25 94.64,84.45 v94.39,84.2
N$33
  Top 0.61: IC5.3 93.24,93.98 91.72,92.46 88.93,92.46 88.16,91.69 IC5.8
N$34  (via drill 0.5)
  Top 0.406: D6.A 93.75,86.82 v93.62,86.74 | C8.1 88.41,83.07
  Top 0.61: IC5.13 94.51,87.25 D6.A | R38.2 C8.1 | 88.41,83.07 89.18,82.3 90.2,82.3 90.58,81.92 v91.72,81.92
  Bottom 0.61: v93.62,86.74 91.72,84.84 v91.72,81.92
N$35  (via drill 0.5)
  Top 0.61: v89.43,93.6 IC5.6 | R36.1 97.56,86.61 v96.93,87.25
  Bottom 0.61: v96.93,87.25 96.93,87.76 96.55,88.14 96.55,93.09 95.02,94.61 90.45,94.61 v89.43,93.6
N$36
  Top 0.406: 90.7,87.58 D6.C 90.78,87.13 89.81,87.13
  Top 0.61: IC5.10 90.7,87.58 | R38.1 89.81,87.13 IC6.4
N$37
  Top 0.406: IC5.12 93.24,88.39
  Top 0.61: IC6.3 IC6.2 92.35,87.5 93.24,88.39
N$38
  Top 0.406: 95.91,82.28 LED11.A
  Top 0.61: R37.2 95.91,82.28
N$39
  Top 0.61: R36.2 LED10.A
N$40  (via drill 0.5)
  Top 0.61: IC5.2 v94.51,93.6 91.97,90.93 IC5.11 | R37.1 95.91,87 v95.66,87.25
  Bottom 0.61: v94.51,93.6 95.66,92.46 v95.66,87.25
N$41  (via drill 0.5)
  Top 0.406: IC8.1 93.65,48.01 v94.39,48.01
  Top 0.61: IC7.9 v89.43,55.12 | v94.39,55.12 94.88,55.64 R49.1
  Bottom 0.61: v89.43,55.12 v94.39,55.12 94.39,51.31 94.64,51.05 94.64,48.26 v94.39,48.01
N$42
  Top 0.61: IC7.3 93.24,57.78 91.72,56.26 88.93,56.26 88.16,55.5 IC7.8
N$43  (via drill 0.5)
  Top 0.406: D7.A 93.75,50.62 v93.62,50.55 | C10.1 88.41,46.87
  Top 0.61: IC7.13 94.51,51.05 D7.A | R46.2 C10.1 | 88.41,46.87 89.18,46.1 90.2,46.1 90.58,45.72 v91.72,45.72
  Bottom 0.61: v93.62,50.55 91.72,48.64 v91.72,45.72
N$44  (via drill 0.5)
  Top 0.61: v89.43,57.4 IC7.6 | R44.1 97.56,50.42 v96.93,51.05
  Bottom 0.61: v96.93,51.05 96.93,51.56 96.55,51.94 96.55,56.9 95.02,58.42 90.45,58.42 v89.43,57.4
N$45
  Top 0.406: 90.7,51.39 D7.C 90.78,50.94 89.81,50.94
  Top 0.61: IC7.10 90.7,51.39 | R46.1 89.81,50.94 IC8.4
N$46
  Top 0.406: IC7.12 93.24,52.2
  Top 0.61: IC8.3 IC8.2 92.35,51.31 93.24,52.2
N$47
  Top 0.406: 95.91,46.09 LED13.A
  Top 0.61: R45.2 95.91,46.09
N$48
  Top 0.61: R44.2 LED12.A
N$49  (via drill 0.5)
  Top 0.61: IC7.2 v94.51,57.4 91.97,54.74 IC7.11 | R45.1 95.91,50.8 v95.66,51.05
  Bottom 0.61: v94.51,57.4 95.66,56.26 v95.66,51.05
N$50  (via drill 0.5)
  Top 0.406: IC10.1 28.09,5.94 v28.09,5.21
  Top 0.61: IC9.9 v35.2,10.16 | v35.2,5.21 35.72,4.71 R57.1
  Bottom 0.61: v35.2,10.16 v35.2,5.21 31.39,5.21 31.14,4.95 28.35,4.95 v28.09,5.21
N$51
  Top 0.61: IC9.3 37.87,6.35 36.35,7.87 36.35,10.67 35.59,11.43 IC9.8
N$52  (via drill 0.5)
  Top 0.406: D8.A 30.71,5.84 v30.63,5.97 | C12.1 26.96,11.19
  Top 0.61: IC9.13 31.14,5.08 D8.A | R54.2 C12.1 | 26.96,11.19 26.19,10.41 26.19,9.4 25.81,9.02 v25.81,7.87
  Bottom 0.61: v30.63,5.97 28.73,7.87 v25.81,7.87
N$53
  Top 0.813: Q7.1 76.46,80.9 R16.2
N$54  (via drill 0.8)
  Top 1.016: Q7.3 74.36,79.59 v75.21,78.74 D16.A
  Bottom 1.27: v75.21,78.74 67.08,70.61 67.08,50.63 J6.1
N$55
  Top 0.813: Q8.1 68.59,80.9 R18.2
N$56  (via drill 0.8)
  Top 1.016: Q8.3 66.49,79.59 v67.34,78.74 D17.A
  Bottom 1.27: v67.34,78.74 64.79,76.19 J2.1
N$57
  Top 0.813: Q9.1 60.72,80.9 R20.2
N$58  (via drill 0.8)
  Top 1.016: Q9.3 58.62,79.59 v59.46,78.74 D18.A
  Bottom 1.27: v59.46,78.74 46,65.28 46,61.72 43.8,59.52 J8.1
N$59
  Top 0.813: Q10.1 52.84,80.9 R22.2
N$60  (via drill 0.8)
  Top 1.016: Q10.3 50.74,79.59 v51.59,78.74 D19.A
  Bottom 1.27: v51.59,78.74 51.59,74.93 41.43,64.77 41.43,50.63 J4.1
N$61
  Top 0.813: Q11.1 44.97,80.9 R24.2
N$62  (via drill 0.8)
  Top 1.016: Q11.3 42.87,79.59 v43.71,78.74 D20.A
  Bottom 1.27: J10.1 43.71,76.39 v43.71,78.74
N$63  (via drill 0.5)
  Top 0.61: v37.49,10.16 IC9.6 | R52.1 30.51,2.03 v31.14,2.67
  Bottom 0.61: v31.14,2.67 31.65,2.67 32.03,3.05 36.98,3.05 38.51,4.57 38.51,9.14 v37.49,10.16
N$64
  Top 0.406: 31.47,8.89 D8.C 31.02,8.81 31.02,9.78
  Top 0.61: IC9.10 31.47,8.89 | R54.1 31.02,9.78 IC10.4
N$65
  Top 0.406: IC9.12 32.28,6.35
  Top 0.61: IC10.3 IC10.2 31.39,7.24 32.28,6.35
N$66
  Top 0.406: 26.18,3.68 LED15.A
  Top 0.61: R53.2 26.18,3.68
N$67
  Top 0.61: R52.2 LED14.A
N$68  (via drill 0.5)
  Top 0.61: IC9.2 v37.49,5.08 34.82,7.62 IC9.11 | R53.1 30.89,3.68 v31.14,3.94
  Bottom 0.61: v37.49,5.08 36.35,3.94 v31.14,3.94
N$69  (via drill 0.5)
  Top 0.406: IC12.1 73.69,5.94 v73.69,5.21
  Top 0.61: IC11.9 v80.8,10.16 | v80.8,5.21 81.32,4.71 R65.1
  Bottom 0.61: v80.8,10.16 v80.8,5.21 76.99,5.21 76.73,4.95 73.94,4.95 v73.69,5.21
N$70
  Top 0.61: IC11.3 83.46,6.35 81.94,7.87 81.94,10.67 81.18,11.43 IC11.8
N$71  (via drill 0.5)
  Top 0.406: D9.A 76.3,5.84 v76.23,5.97 | C14.1 72.55,11.19
  Top 0.61: IC11.13 76.73,5.08 D9.A | R62.2 C14.1 | 72.55,11.19 71.78,10.41 71.78,9.4 71.4,9.02 v71.4,7.87
  Bottom 0.61: v76.23,5.97 74.32,7.87 v71.4,7.87
N$72  (via drill 0.5)
  Top 0.61: v83.08,10.16 IC11.6 | R60.1 76.1,2.03 v76.73,2.67
  Bottom 0.61: v76.73,2.67 77.24,2.67 77.62,3.05 82.58,3.05 84.1,4.57 84.1,9.14 v83.08,10.16
N$73
  Top 0.406: 77.07,8.89 D9.C 76.62,8.81 76.62,9.78
  Top 0.61: IC11.10 77.07,8.89 | R62.1 76.62,9.78 IC12.4
N$74
  Top 0.406: IC11.12 77.88,6.35
  Top 0.61: IC12.3 IC12.2 76.99,7.24 77.88,6.35
N$75
  Top 0.406: 71.77,3.68 LED17.A
  Top 0.61: R61.2 71.77,3.68
N$76
  Top 0.61: R60.2 LED16.A
N$77
  Top 0.813: U$14.P$3 78,81.16 R16.1
N$78
  Top 0.813: U$14.P$1 80.94,89.04 R17.2
N$79  (via drill 0.5)
  Top 0.61: IC11.2 v83.08,5.08 80.42,7.62 IC11.11 | R61.1 76.48,3.68 v76.73,3.94
  Bottom 0.61: v83.08,5.08 81.94,3.94 v76.73,3.94
N$80
  Top 0.813: U$13.P$3 70.13,81.16 R18.1
N$81
  Top 0.813: U$15.P$3 62.26,81.16 R20.1
N$82
  Top 0.813: R22.1 54.38,81.4 U$16.P$3
N$83
  Top 0.813: U$17.P$3 46.51,81.16 R24.1
N$85
  Top 0.813: U$13.P$1 73.06,89.04 R19.2
N$87
  Top 0.813: U$15.P$1 65.19,89.04 R21.2
N$89
  Top 0.813: U$16.P$1 57.31,89.04 R23.2
N$91
  Top 0.813: U$17.P$1 49.44,89.04 R25.2
N$104  (via drill 0.6)
  Top 0.61: 24.87,44.82 24.92,44.77 v24.92,43.43
  Top 0.813: R12.1 24.87,44.82 23.19,44.82 R86.2
  Bottom 0.61: JP1.3 24.92,41.86 v24.92,43.43
NULL
  Top 1.778: J5.1 J1.1 68.88,70.69 J9.1 | J3.1 J7.1 J9.1 | 48.79,34.29 JP4.2 48.71,34.37 47.27,35.81 47.27,62.99 54.97,70.69 J9.1
RTD+
  Top 1.016: J15.1 12.47,37.56 JP35.2
RTD-
  Top 1.016: J18.1 16.03,48.01 16.03,39 JP35.1
RX
  Top 0.406: 3.82,24.26 IC1.1 3.33,24.26 1.8,22.73
  Top 0.61: R26.1 3.82,24.26 | JP25.2 1.8,22.73
RX1
  Top 0.406: 49.42,23.88 IC3.1 48.92,23.88 47.4,22.35
  Top 0.61: R34.1 49.42,23.88 | JP14.2 47.4,22.35
RX2
  Top 0.406: 95.78,95.9 IC5.1 95.78,96.39 94.26,97.92
  Top 0.61: R42.1 95.78,95.9 | JP17.2 94.26,97.92
RX3
  Top 0.406: 95.78,59.7 IC7.1 95.78,60.2 94.26,61.72
  Top 0.61: R50.1 95.78,59.7 | JP18.2 94.26,61.72
RX4
  Top 0.406: 39.79,3.81 IC9.1 40.28,3.81 41.81,5.33
  Top 0.61: R58.1 39.79,3.81 | JP21.2 41.81,5.33
RX5
  Top 0.406: 85.38,3.81 IC11.1 85.88,3.81 87.4,5.33
  Top 0.61: R66.1 85.38,3.81 | JP24.2 87.4,5.33
RXD1
  Top 0.61: D2.C 28.73,70.61 26.44,72.9 JP2.9
S$1  (via drill 0.5, 0.7)
  Top 0.61: IC2.8 22.38,22.1 23.01,22.73 23.01,23.61 C3.2 23.02,23.99 22.25,24.77 22.25,25.26 R14.1 22.11,25.41 | IC1.14 10.82,24.26 v10.82,26.04 R15.2 | R26.2 v6.5,26.04
  Top 0.813: 22.11,25.41 v21.23,26.29
  Bottom 0.61: v6.5,26.04 6.5,26.67 6.63,26.67 | v10.82,26.04 10.82,26.67
  Bottom 0.813: v21.23,26.29 20.85,26.67 10.82,26.67 6.63,26.67 3.07,26.67 JP25.1
TX
  Top 0.406: 4.19,20.19 IC1.4
  Top 0.61: IC1.5 IC1.4 | JP25.3 4.19,20.19
TX1
  Top 0.406: 49.78,19.81 IC3.4
  Top 0.61: IC3.5 IC3.4 | JP14.3 49.78,19.81
TX2
  Top 0.406: 91.72,95.53 IC5.4
  Top 0.61: IC5.5 IC5.4 | JP17.3 91.72,95.53
TX3
  Top 0.406: 91.72,59.33 IC7.4
  Top 0.61: IC7.5 IC7.4 | JP18.3 91.72,59.33
TX4
  Top 0.406: 39.42,7.87 IC9.4
  Top 0.61: IC9.5 IC9.4 | JP21.3 39.42,7.87
TX5
  Top 0.406: 85.01,7.87 IC11.4
  Top 0.61: IC11.5 IC11.4 | JP24.3 85.01,7.87
TXD1  (via drill 0.6)
  Top 0.61: v34.82,70.61 D2.A
  Bottom 0.61: JP2.10 32.03,70.61 v34.82,70.61
  Bottom 0.813: JP12.4 20.35,65.02 JP2.10
(copper drawn outside any net)
  shapes: Top area x5

## Text on the board
tPlace: TTL-485 ADAPTER => | K1 | K2 | K3 | K4 | K5 | 74HC04D | B9 | B8 | B7 | B6 | B5 | A9 | A8 | A15 | A14 | A13 | A10 | B15 | GND | BOOT | USB | <= TTL-485 ADAPTER | 470uF/25V | MAX | 485 | ESA+ | VIN | A0 | A1 | A2 | A3 | A4 | A5 | A6 | A7 | B10 | B11 | B13 | B14 | 3V3 | A+ | B- | muRata | K1 | DC-DC | OKI-78SR-5 | MAX31865 | F- | 74HC04D | K5 | K3 | RTD- | RTD+ | MAX | K2 | 485 | K4 | ESA+ | F+ | SS34 | A+ | B- | B- | B- | MAX | 485 | ESA+ | MAX | 485 | ESA+ | 74HC04D | 74HC04D | A+ | A+ | A+ | A+ | 74HC04D | 74HC04D | ESA+ | 485 | MAX | ESA+ | 485 | MAX | B- | B-
bPlace: RX | TX | GND | VCC | TTL-485 | 4k7 | 56k | 2k4 | 2k4 | 33p | LED | LED | 4k7 | 100n | 4k7 | 120 | A+ | SM712 | B- | RX | TX | GND | VCC | TTL-485 | 4k7 | 4-20mA | 0-10V | 56k | 2k4 | 2k4 | 33p | If 485 is used | 4-20mA | 0-10V | LED | LED | I or RTD not | 4k7 | A+ | B- | A+ | B- | 100n | 4k7 | 120 | VDC | RTD | I | AC RELAYS | A+ | SM712 | B- | +5V | GND | RT+ | RT- | F- | Iin | Ignd | NULL | K1 | K2 | K3 | K4 | K5 | 4k7 | 2k4 | LED | VCC | 4k7 | B- | 4k7 | 2k4 | LED | B- | 2k4 | LED | VCC | 4k7 | 100n | 2k4 | LED | 100n | TX | TTL-485 | TX | TTL-485 | SM712 | SM712 | RX | RX | 120 | GND | GND | 120 | 56k | 33p | 4k7 | A+ | 56k | 33p | 4k7 | A+ | A+ | 4k7 | 33p | 56k | A+ | 4k7 | 33p | 56k | GND | GND | 120 | 120 | RX | RX | SM712 | SM712 | TTL-485 | TX | TTL-485 | TX | 100n | 100n | LED | 2k4 | LED | 2k4 | B- | 4k7 | 2k4 | 4k7 | VCC | B- | 4k7 | 2k4 | 4k7 | VCC | LED | LED